# EAGLE board stm32hw03 (EAGLE 6.6.0)
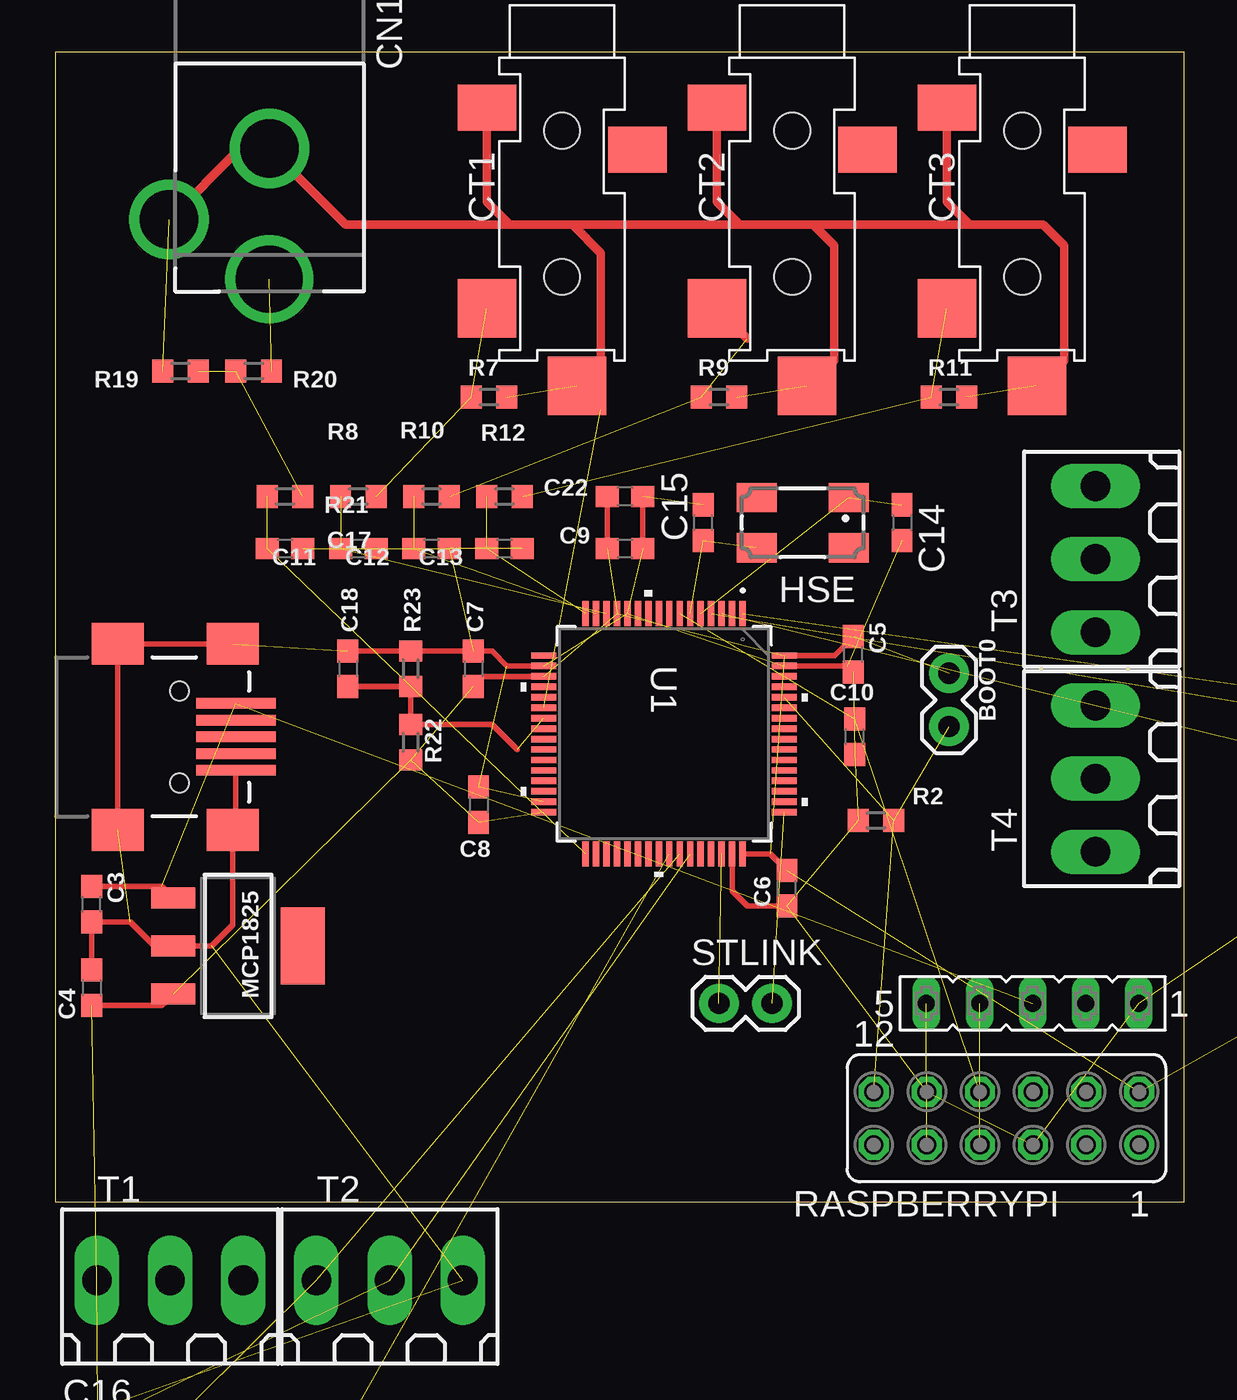
[diagram p0: board, top side]

Size 54 x 55 mm. Coordinates in mm from the lower left corner, seen from the top.
Outline: 0,0 54,0 54,55 0,55 0,0
Copper layers (1*16): Top 0.035mm / dielectric 1.5mm / Bottom 0.035mm
Design rules "default": minimum track width 10mil, minimum drill 24mil, track to track 8mil, track to pad 8mil, pad to pad 8mil, via to via 8mil, smd to smd 8mil, copper to edge 40mil, drill to drill 8mil, minimum pad ring 10mil, minimum via ring 8mil, stop-mask expansion 4mil, vias tented up to drill 0mil, thermal gap 10mil
Net classes: 0 default: width 0.203 mm, drill 0.6 mm, clearance 0.203 mm; 1 power: width 0.381 mm, drill 0.6 mm, clearance 0.254 mm; 2 gnd: width 0.254 mm, drill 0.6 mm, clearance 0.254 mm

## Footprints (pad centres in the part's own frame; a part is rotated, then mirrored left to right if it is on the bottom)
SJ_2S-NO = smd 0.635 x 1.27: 1 -0.45,0; 2 0.45,0
1X02 = drill 1.016 pad 1.88: 1 0,0; 2 2.54,0
C0603 = smd 1.1 x 1: 1 -0.85,0; 2 0.85,0
DCJACK_2MM_PTH = drill 2.8: GND 0,7.35; GNDBREAK 4.8,10.75 | drill 3.2: PWR 0,13.6
CR1220SMD = smd 3.54 x 2.6: P+ 8.3,0; P- -7.55,0 | hole 1: -3.5,0 | hole 1.3: 4,0
STEREO_SMT = smd 2.8 x 2.2: P$1 -3.6,-2.4; P$3 3.6,-4.4 | smd 2.8 x 2.8: P$2 -3.6,-12; P$4 0.7,-15.7 | hole 1.7: 0,-3.5; 0,-10.5
FE05-1 = drill 0.813 long: 1 -5.08,0; 2 -2.54,0; 3 0,0; 4 2.54,0; 5 5.08,0
CTS406 = smd 1.9 x 1.4: 1 -2.2,-1.2; 2 2.2,-1.2; 3 2.2,1.2; 4 -2.2,1.2
CHIP-LED0805 = smd 1.2 x 1.2: A 0,-1.05; C 0,1.05
MC-306 = smd 1.3 x 1.9: 1 -2.75,-1.6; 2 2.75,-1.6; 3 2.75,1.6; 4 -2.75,1.6
SOT-223 = smd 1 x 2.1: 1 -2.3,-3.1; 2 0,-3.1; 3 2.3,-3.1 | smd 3.7 x 2.1: 4 0,3.1
R0603 = smd 1 x 1.1: 1 -0.85,0; 2 0.85,0
FE06-2 = drill 0.914: 1 -6.35,1.27 | drill 0.914 octagon: 2 -6.35,-1.27; 3 -3.81,1.27; 4 -3.81,-1.27; 5 -1.27,1.27; 6 -1.27,-1.27; 7 1.27,1.27; 8 1.27,-1.27; 9 3.81,1.27; 10 3.81,-1.27; 11 6.35,1.27; 12 6.35,-1.27
180-3 = drill 1.422 long: 1 -3.5,0; 2 0,0; 3 3.5,0
LQFP64-10X10MM = smd 1.194 x 0.305: 1 -5.75,3.75; 2 -5.75,3.25; 3 -5.75,2.75; 4 -5.75,2.25; 5 -5.75,1.75; 6 -5.75,1.25; 7 -5.75,0.75; 8 -5.75,0.25; 9 -5.75,-0.25; 10 -5.75,-0.75; 11 -5.75,-1.25; 12 -5.75,-1.75; 13 -5.75,-2.25; 14 -5.75,-2.75; 15 -5.75,-3.25; 16 -5.75,-3.75; 33 5.75,-3.75; 34 5.75,-3.25; 35 5.75,-2.75; 36 5.75,-2.25; 37 5.75,-1.75; 38 5.75,-1.25; 39 5.75,-0.75; 40 5.75,-0.25; 41 5.75,0.25; 42 5.75,0.75; 43 5.75,1.25; 44 5.75,1.75; 45 5.75,2.25; 46 5.75,2.75; 47 5.75,3.25; 48 5.75,3.75 | smd 0.305 x 1.194: 17 -3.75,-5.75; 18 -3.25,-5.75; 19 -2.75,-5.75; 20 -2.25,-5.75; 21 -1.75,-5.75; 22 -1.25,-5.75; 23 -0.75,-5.75; 24 -0.25,-5.75; 25 0.25,-5.75; 26 0.75,-5.75; 27 1.25,-5.75; 28 1.75,-5.75; 29 2.25,-5.75; 30 2.75,-5.75; 31 3.25,-5.75; 32 3.75,-5.75; 49 3.75,5.75; 50 3.25,5.75; 51 2.75,5.75; 52 2.25,5.75; 53 1.75,5.75; 54 1.25,5.75; 55 0.75,5.75; 56 0.25,5.75; 57 -0.25,5.75; 58 -0.75,5.75; 59 -1.25,5.75; 60 -1.75,5.75; 61 -2.25,5.75; 62 -2.75,5.75; 63 -3.25,5.75; 64 -3.75,5.75
USB-MINIB-CISECO = smd 3.8 x 0.5: D+ 7.9,0; D- 7.9,0.8; GND 7.9,-1.6; ID 7.9,-0.8; VBUS 7.9,1.6 | smd 2.5 x 2: MTN1 2.25,4.45; MTN2 7.75,4.45; MTN3 2.25,-4.45; MTN4 7.75,-4.45 | hole 0.9: 5.2,2.2; 5.2,-2.2

## Placement (x,y rotation side)
3V3  SOLDERJUMPERNO  [SJ_2S-NO]  80.64,21.23 0 top  (outside the outline)
BATTERY  SOLDERJUMPERNO  [SJ_2S-NO]  83.75,21.25 0 top  (outside the outline)
BOOT0  [1X02]  42.75,22.75 90 top
C1  4.3p  [C0603]  70,21.25 180 top  (outside the outline)
C2  4.3p  [C0603]  73.5,21.25 0 top  (outside the outline)
C3  4.7uF  [C0603]  1.75,14.25 90 top
C4  4.7uF  [C0603]  1.75,10.25 270 top
C5  100nF  [C0603]  38.18,26.2 90 top
C6  100nF  [C0603]  35,15 90 top
C7  100nF  [C0603]  20,25.5 270 top
C8  100nF  [C0603]  20.25,19 270 top
C9  100nF  [C0603]  27.25,31.25 180 top
C10  100nF  [C0603]  38.25,22.25 90 top
C11  100nF  [C0603]  14.5,31.25 180 top
C12  100nF  [C0603]  18,31.25 180 top
C13  100nF  [C0603]  21.5,31.25 180 top
C14  18pF  [C0603]  40.5,32.5 270 top
C15  18pF  [C0603]  31,32.5 90 top
C16  100nF  [C0603]  1.25,-10.5 0 top  (outside the outline)
C17  100nF  [C0603]  11,31.25 180 top
C18  10uF  [C0603]  14,25.5 270 top
C22  1uF  [C0603]  27.25,33.75 180 top
CN1  AC 9V  [DCJACK_2MM_PTH]  10.25,57.75 180 top
CR1220  CR1220SMD  [CR1220SMD]  83.25,9.14 90 top  (outside the outline)
CT1  STEREO_SMD  [STEREO_SMT]  24.25,54.75 0 top
CT2  STEREO_SMD  [STEREO_SMT]  35.25,54.75 0 top
CT3  STEREO_SMD  [STEREO_SMT]  46.25,54.75 0 top
GND  UART  [FE05-1]  46.75,9.5 180 top
HSE  8MHZ  [CTS406]  35.75,32.5 180 top
LED1  Red 1.85V  [CHIP-LED0805]  2.5,-26.25 0 top  (outside the outline)
LSE  32.768kHz  [MC-306]  71.75,16 270 top  (outside the outline)
MCP1825  MCP1825SOT-223-3  [SOT-223]  8.75,12.25 270 top
R1  4.7k  [R0603]  1.25,-15.75 0 top  (outside the outline)
R2  10k  [R0603]  39.25,18.25 180 top
R3  1K  [R0603]  1.25,-31.75 0 top  (outside the outline)
R7  22r  [R0603]  20.75,38.5 0 top
R8  330R  [R0603]  14.5,33.75 180 top
R9  22r  [R0603]  31.75,38.5 0 top
R10  330R  [R0603]  18,33.75 180 top
R11  22r  [R0603]  42.75,38.5 0 top
R12  330R  [R0603]  21.5,33.75 180 top
R19  10k  [R0603]  6,39.75 180 top
R20  120k  [R0603]  9.5,39.75 180 top
R21  330R  [R0603]  11,33.75 180 top
R22  10k  [R0603]  17,22 270 top
R23  10k  [R0603]  17,25.5 270 top
RASPBERRYPI  [FE06-2]  45.5,4 180 top
STLINK  [1X02]  31.75,9.5 0 top
T1  [180-3]  5.5,-3.75 0 top  (outside the outline)
T2  [180-3]  16,-3.75 0 top  (outside the outline)
T3  [180-3]  49.75,30.75 90 top
T4  [180-3]  49.75,20.25 90 top
U1  STM32F303_334RXT  [LQFP64-10X10MM]  29.12,22.39 270 top
U$10  USB-MINIB-5PIN  [USB-MINIB-CISECO]  0.75,22.25 0 top

## Library data of the parts
3V3 BATTERY BOOT0 STLINK = SparkFun
C1-C18 C22 R1 R2 R7-R12 R19-R23 = resistor
CN1 LED1 = adafruit
CR1220 = IotaWatt_parts; MPN: Harwin S8411-45R
CT1-CT3 = IotaWatt_parts
GND RASPBERRYPI = con-lsta; OC_FARNELL: unknown; OC_NEWARK: unknown
HSE = crystal; OC_FARNELL: unknown; OC_NEWARK: unknown
LSE = crystal; MPN: MC-306 60.0KHZ 100PPM ,12.5PF; OC_FARNELL: 1278040; OC_NEWARK: 31M5576
MCP1825 = SteelCaveRobotics-Power
R3 = rcl
T1-T4 = con-weidmueller-sl35; OC_FARNELL: unknown; OC_NEWARK: unknown
U1 = stm32f303; MANUFACTURER_PART_NUMBER: stm32f303_334rxt; VENDOR: STMicroelectronics
U$10 = Ciseco USB miniB_Updated

## Nets
+3V3: 3V3.1 BOOT0.2 C4.2 C5.2 C6.2 C7.2 C8.2 C9.2 C22.2 MCP1825.3 R1.2 R22.2 RASPBERRYPI.2 T1.1 U1.13 U1.19 U1.32 U1.48 U1.64
+5V: C3.2 GND.3 MCP1825.1 U$10.VBUS
AC: CN1.PWR R20.1
ADC0: R19.1 R20.2 R21.1
BIAS: CN1.GND CN1.GNDBREAK CT1.P$1 CT1.P$4 CT2.P$1 CT2.P$4 CT3.P$1 CT3.P$4 R7.2 R9.2 R11.2 R19.2 U1.22
BIAS_IN: C18.2 R22.1 R23.2 U1.23
BOOT0: BOOT0.1 R2.1 RASPBERRYPI.12 U1.60
CT1: C11.2 R8.2 U1.14
CT2: C12.2 R10.2 U1.15
CT3: C13.2 R12.2 U1.16
DS18B20: R1.1 T2.1 U1.42
GND: C1.2 C2.2 C3.1 C4.1 C5.1 C6.1 C7.1 C8.1 C9.1 C10.1 C11.1 C12.1 C13.1 C14.2 C15.2 C16.1 C17.1 C18.1 C22.1 CR1220.P- GND.1 LED1.C MCP1825.2 R2.2 R23.1 RASPBERRYPI.5 RASPBERRYPI.10 T2.3 U1.12 U1.18 U1.31 U1.47 U1.63 U$10.GND U$10.MTN1 U$10.MTN2 U$10.MTN3 U$10.MTN4
HSE_IN: C14.1 HSE.1 U1.5
HSE_OUT: C15.1 HSE.3 U1.6
LED: R3.2 U1.41
LSE_IN: C1.1 LSE.1 U1.3
LSE_OUT: C2.1 LSE.4 U1.4
N$1: BATTERY.2 CR1220.P+
N$2: CT1.P$2 R7.1 R8.1
N$6: U1.28
N$7: T1.2
N$8: CT2.P$2 R9.1 R10.1
N$9: T1.3
N$10: CT3.P$2 R11.1 R12.1
N$41: LED1.A R3.1
NRST: C10.2 RASPBERRYPI.8 U1.7
PULSE: C16.2 T2.2 U1.43
SWCLK: STLINK.2 U1.49
SWDIO: STLINK.1 U1.46
UART2_RX: GND.4 RASPBERRYPI.7
UART2_TX: GND.5 RASPBERRYPI.9
UART3_RX: U1.30
UART3_TX: U1.29
VBAT: 3V3.2 BATTERY.1 U1.1
VSIG: C17.2 R21.2 U1.33

## Tracks (layer width: path | path; a pad name or v marks a point on that pad's centre or on a via)
+3V3  (13 unrouted)
  Top 0.254: U1.19 20.49,25.14 C7.2 20,24.75 | C6.2 34.21,16.64 U1.48 | C4.2 5.1,9.4 MCP1825.3 | C22.2 C9.2 | C5.2 37.28,26.14 U1.64
+5V  (2 unrouted)
  Top 0.254: C3.2 5.1,15.1 MCP1825.1
AC  (1 unrouted)
ADC0  (2 unrouted)
BIAS  (5 unrouted)
  Top 0.406: CN1.GNDBREAK 8.85,50.4 CN1.GND 13.9,46.75 21.75,46.75 | 21.55,53.25 CT1.P$1 20.65,47.85 21.75,46.75 | 30.75,53.25 CT2.P$1 | CT2.P$1 32.55,53.25 | CT1.P$4 26.1,37.9 26.1,45.4 24.75,46.75 | CT2.P$4 37.1,37.9 37.1,40.1 37.25,40.25 37.25,45.75 36.25,46.75 | 36.25,46.75 43.75,46.75 | 43.75,46.75 47.25,46.75 48.25,45.75 48.25,40.25 47.05,39.05 CT3.P$4 | 36.25,46.75 32.75,46.75 | 32.75,46.75 24.75,46.75 | 24.75,46.75 21.75,46.75 | CT2.P$1 31.65,47.85 32.75,46.75 | CT3.P$1 42.65,47.85 43.75,46.75
BIAS_IN  (1 unrouted)
  Top 0.254: C18.2 R23.2 R22.1 20.9,22.85 22.11,21.64
BOOT0  (3 unrouted)
CT1  (2 unrouted)
CT2  (2 unrouted)
CT3  (2 unrouted)
DS18B20  (2 unrouted)
GND  (25 unrouted)
  Top 0.254: C18.1 R23.1 C7.1 20.9,26.35 21.61,25.64 U1.18 | C6.1 33.1,14.15 32.37,14.88 U1.47 | C4.1 C3.1 3.6,13.4 4.75,12.25 MCP1825.2 7.5,12.25 8.5,13.25 U$10.MTN4 8.65,17.95 U$10.GND | U$10.MTN3 U$10.MTN1 U$10.MTN2 | C22.1 C9.1 | C5.1 37.88,25.64 U1.63
HSE_IN  (2 unrouted)
HSE_OUT  (2 unrouted)
LED  (1 unrouted)
LSE_IN  (2 unrouted)
LSE_OUT  (2 unrouted)
N$1  (1 unrouted)
N$2  (2 unrouted)
N$8  (2 unrouted)
  Top 0.406: CT2.P$2 33.1,41.3
N$10  (2 unrouted)
N$41  (1 unrouted)
NRST  (2 unrouted)
PULSE  (2 unrouted)
SWCLK  (1 unrouted)
SWDIO  (1 unrouted)
UART2_RX  (1 unrouted)
UART2_TX  (1 unrouted)
VBAT  (2 unrouted)
VSIG  (2 unrouted)